# Altium PCB ReceiverPCB.PcbDoc
Units mm, origin at the board's own origin, x right, y up, seen from the top; angles counter-clockwise.
Board outline 74.42 x 28.07 mm, 2 copper layers (Top Layer, Bottom Layer); 47 components, 40 nets, 143 pads, 89 vias.
Unrouted connection lines stored in the file: 1.
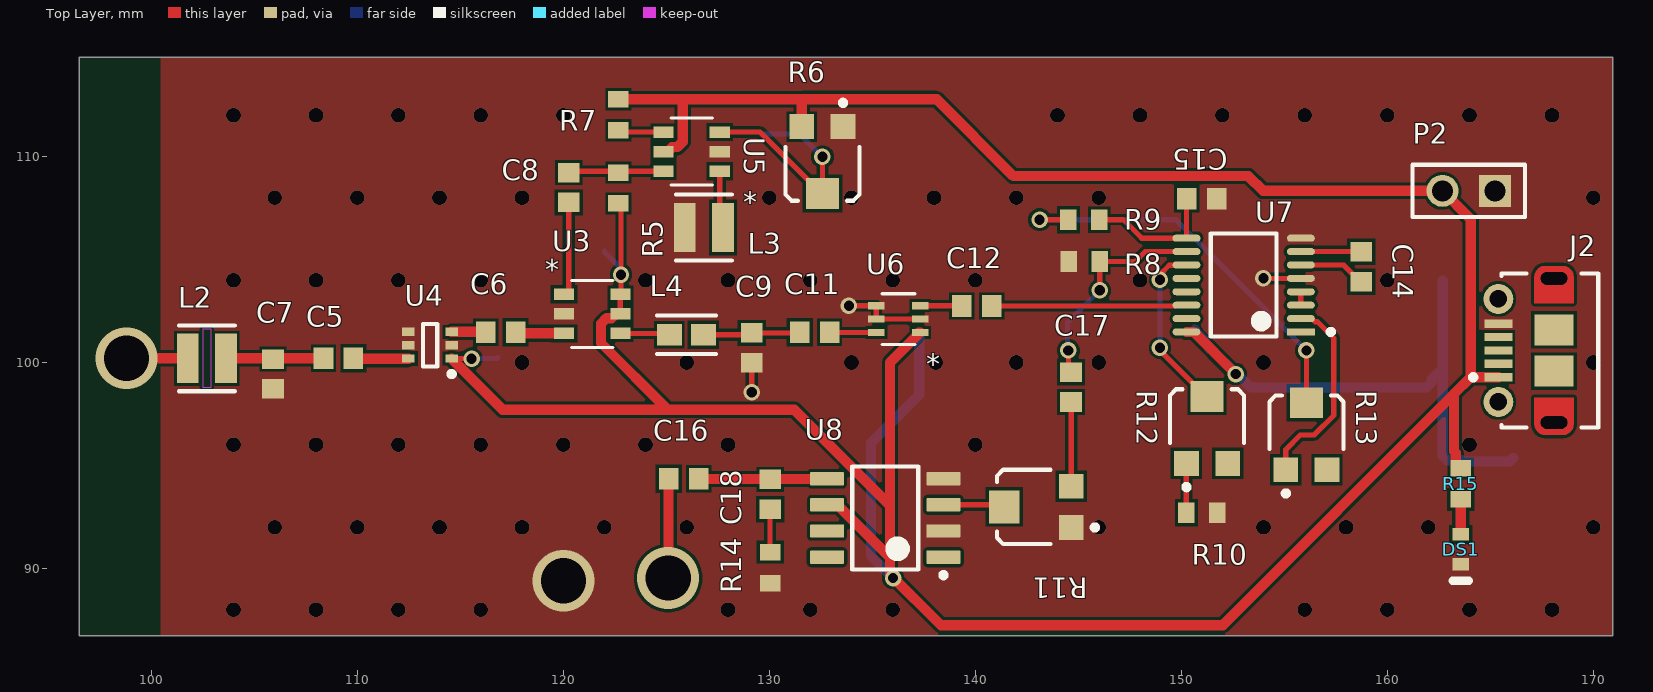
[diagram p0: Top Layer view]
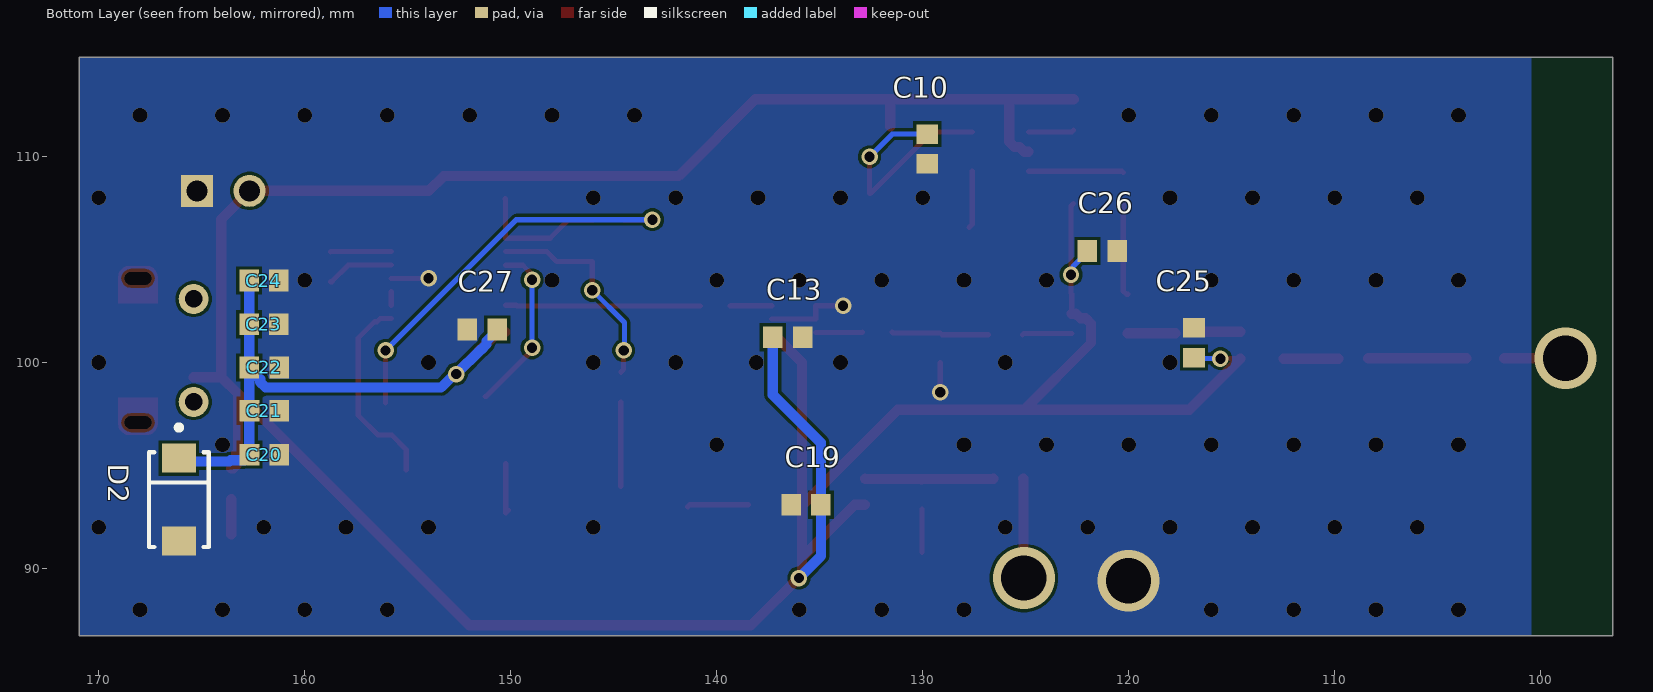
[diagram p1: Bottom Layer view, seen from below]
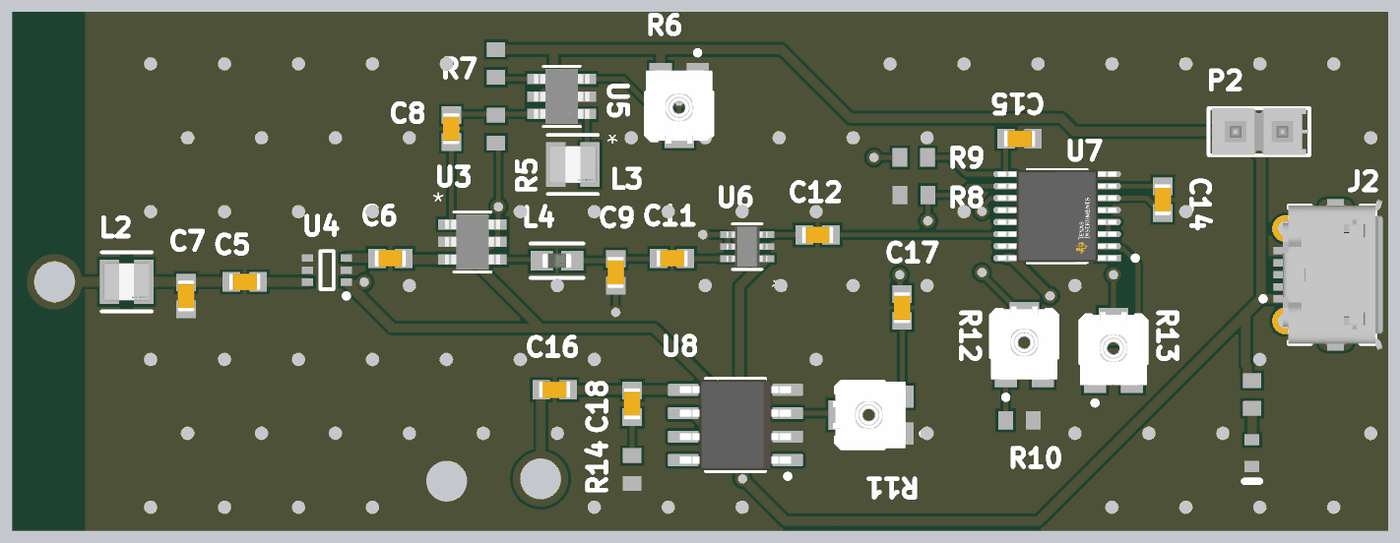
[diagram p2: 3D render of the assembled board from above, using the file's embedded part models]
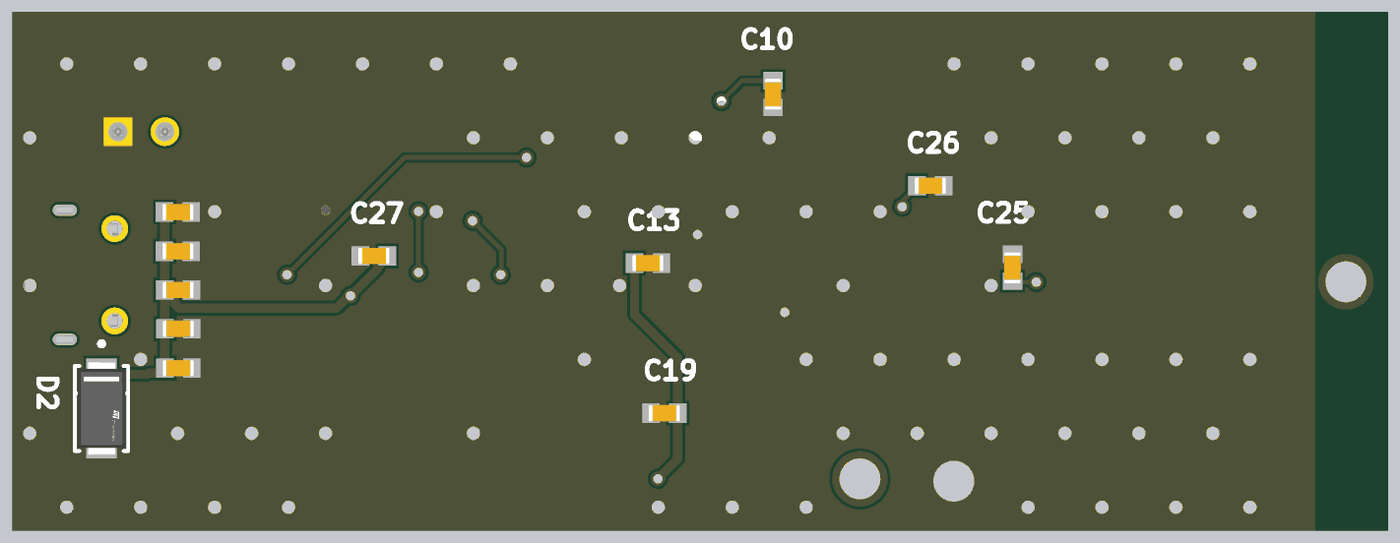
[diagram p3: 3D render of the assembled board from below, using the file's embedded part models]

## Layer stack, top to bottom
Top Solder: solder mask 0.0102, Solder Resist, Dk 3.5
Top Layer: signal copper 0.0356
Dielectric 1: dielectric 0.32, FR-4, Dk 4.8
Bottom Layer: signal copper 0.0356
Bottom Solder: solder mask 0.0102, Solder Resist, Dk 3.5

## Board outline
96.52,86.741 170.942,86.741 170.942,114.808 96.52,114.808

## Design rules (kind name [scope] priority, off if disabled: settings)
Clearance [All] p1: gap=0.15 ignorepadtopadclearanceinfootprint=FALSE
MinimumSolderMaskSliver [All] p1: minsoldermaskwidth=0.1
PolygonConnect [All] p1: connectstyle=Direct reliefconductorwidth=0.254 reliefentries=4 polygonreliefangle="90 Angle" airgapwidth=0.254
RoutingVias [All] p1: holewidth=8 width=10 viastyle="Through Hole" minholewidth=0.2 minwidth=0.4 maxholewidth=0.711 maxwidth=1.27
SolderMaskExpansion [All] p1: expansion=0 istentingtop=FALSE
SupplyNets "Schematic Supply Nets_1" [InNet('GND')] p1: voltage=0.000
SupplyNets "Schematic Supply Nets" [InNet('+5V')] p2: voltage=0.000
Width [All] p1: maxlimit=10 minlimit=0.1 preferedwidth=0.254 minimp=50.000000 maximp=50.000000 favimp=50.000000
29 further rules are at their usual default settings.

## Classes and differential pairs
component class Transmitter: C19 C20 C21
component class Receiver: C5 C6 C7 C8 C9 C10 C11 C12 C13 C14 C15 C16 C17 C18 C22 C23 C24 C25 C26 C27 D2 DS1 J2 L2 L3 L4 P2 R5 R6 R7 R8 R9 R10 R11 R12 R13 R14 R15 U3 U4 U5 U6 U7 U8

## Components (designator, comment, footprint, x,y, rotation, side; value= is the part's Value field where it differs from the comment)
C5 "100p" CAPC1608X90X35ML10T15 109.093,100.203 r0 top
C6 "100p" CAPC1608X90X35ML10T15 116.967,101.473 r0 top
C7 "111p" CAPC1608X90X35ML10T15 105.918,99.441 r90 top
C8 "100p" CAPC1608X90X35ML10T15 120.269,108.495 r270 top
C9 "125n" CAPC1608X90X35ML10T15 129.159,100.711 r90 top
C10 "100n" CAPC1608X90X35ML10T15 129.794,110.363 r90 bottom
C11 "1n" CAPC1608X90X35ML10T15 132.207,101.473 r180 top
C12 "1n" CAPC1608X90X35ML10T15 140.081,102.743 r180 top
C13 "22n" CAPC1608X90X35ML10T15 136.562,101.219 r0 bottom
C14 "1n" CAPC1608X90X35ML10T15 158.75,104.648 r270 top
C15 "100n" CAPC1608X90X35ML10T15 151.003,107.95 r180 top
C16 "250u" CAPC1608X90X35ML10T15 125.857,94.361 r180 top
C17 "100n" CAPC1608X90X35ML10T15 144.653,98.806 r270 top
C18 "50n" CAPC1608X90X35ML10T15 130.048,93.599 r90 top
C19 "1u" CAPC1608X90X35ML10T15 135.673,93.091 r180 bottom
C20 "1u" CAPC1608X90X35ML10T15 161.962,95.53 r0 bottom
C21 "1u" CAPC1608X90X35ML10T15 161.962,97.663 r0 bottom
C22 "100n" CAPC1608X90X35ML10T15 161.972,99.76 r0 bottom
C23 "100n" CAPC1608X90X35ML10T15 161.985,101.858 r0 bottom
C24 "100n" CAPC1608X90X35ML10T15 161.985,103.981 r0 bottom
C25 "100n" CAPC1608X90X35ML10T15 116.84,100.965 r270 bottom
C26 "100n" CAPC1608X90X35ML10T15 121.285,105.41 r0 bottom
C27 "100n" CAPC1608X90X35ML10T15 151.384,101.6 r180 bottom
D2 "SMAJ5.0A-TR" FP-SMA-MFG 166.116,93.345 r270 bottom
DS1 "TLMS1000-GS08" VISH-TLMS1000_V 163.576,90.932 r270 top
J2 "105017-0001" USB-MICRO-B_V 166.751,100.584 r90 top
L2 "1nH" FP-SRN2512-MFG 102.707,100.203 r0 top
L3 "11nH" FP-SRN2512-MFG 126.837,106.553 r0 top
L4 "1uH" FP-LQG18HH_00-IPC_A 125.984,101.346 r0 top
P2 "TSW-102-26-F-S" SMTC-TSW-102-26-XX-S 165.227,108.331 r180 top
R5 "1k" RESC1608X55X25ML10T15 122.682,108.47 r90 top
R6 "TC33X-2-103E" BOUR-TC33X-2_V 132.588,109.654 r270 top
R7 "1k" RESC1608X55X25ML10T15 122.682,112.026 r90 top
R8 "100k" RESC1608X55X25ML10T15 145.288,104.902 r180 top
R9 "1k" RESC1608X55X25ML10T15 145.276,106.934 r180 top
R10 "22k" RESC1608X55X25ML10T15 151.003,92.71 r0 top
R11 "TC33X-2-103E" BOUR-TC33X-2_V 142.863,92.992 r180 top
R12 "TC33X-2-103E" BOUR-TC33X-2_V 151.257,96.901 r90 top
R13 "TC33X-2-103E" BOUR-TC33X-2_V 156.083,96.594 r90 top
R14 "10" RESC1608X55X25ML10T15 130.048,90.043 r270 top
R15 "1k" RESC1608X55X25ML10T15 163.576,94.107 r270 top
U3 "MAX2680AUT+T" 21-0058I_MXM 121.412,102.362 r0 top
U4 "SMA3101-TL-E" ONSC-MCPH-6_V 113.538,100.838 r180 top
U5 "MAX2608EUT+T" 21-0058I_MXM 126.238,110.236 r180 top
U6 "BGA2815,115" SOT_2815,115_NXP 136.271,102.108 r180 top
U7 "CD74HC4046APWR" FP-PW0016A-IPC_C 153.035,103.759 r180 top
U8 "LM386M-1" D0008A_M 135.636,92.456 r180 top

## Footprints (in the part's own frame and the unit in brackets; to place one, negate y for a bottom-side part, rotate by r counter-clockwise, add the part's x,y. Pads: shape width x height; smd on the part's side, far side on the other; paste and mask are expansions set on the pad)
21-0058I_MXM [mil]
  rect 38.5x22 smd paste+0 mask+0: 1(-53.75,37.4) 2(-53.75,0) 3(-53.75,-37.4) 4(53.75,-37.4) 5(53.75,0) 6(53.75,37.4)
  silkscreen extent -40,-64 40,64, body extent -59,-59 59,59, height 57
BOUR-TC33X-2_V [mm] "SMD, 3-Leads, Body 3.8x3.6mm"
  rect 1.2x1.2 smd: 1(-1.8,1) 3(-1.8,-1)
  rect 1.5x1.6 smd: 2(1.45,0)
  silkscreen extent -3.07,-1.8 1.8,1.8, body extent -2,-1.8 1.96,1.8, height 1.15
CAPC1608X90X35ML10T15 [mm] "Chip Capacitor, 2-Leads, Body 1.7x0.9mm, IPC Low Density"
  rect 0.95x1.05 smd: 1(-0.725,0) 2(0.725,0)
  body extent -0.85,-0.45 0.85,0.45, height 0.9
D0008A_M [mm] "SOIC, 8-Leads, Body 5x4mm, Pitch 1.27mm, IPC Low Density"
  rrect15% 1.65x0.65 smd: 1(-2.825,1.905) 2(-2.825,0.635) 3(-2.825,-0.635) 4(-2.825,-1.905) 5(2.825,-1.905) 6(2.825,-0.635) 7(2.825,0.635) 8(2.825,1.905)
  silkscreen extent -2.95,-2.5 1.6,2.9, body extent -3,-2.45 3,2.45, height 1.63
FP-LQG18HH_00-IPC_A [mm]
  rect 1.206x1.058 smd paste+0 mask+0: 1(-0.826,0) 2(0.826,0)
  silkscreen extent -1.43,-0.93 1.43,0.93, body extent -1.93,-1.03 1.93,1.03, height 0.25
FP-PW0016A-IPC_C [mm]
  rect 1.355x0.341 smd paste+0 mask+0: 1(-2.775,2.275)
  rrect100% 1.355x0.341 smd paste+0 mask+0: 2(-2.775,1.625) 3(-2.775,0.975) 4(-2.775,0.325) 5(-2.775,-0.325) 6(-2.775,-0.975) 7(-2.775,-1.625) 8(-2.775,-2.275) 9(2.775,-2.275) 10(2.775,-1.625) 11(2.775,-0.975) 12(2.775,-0.325) 13(2.775,0.325) 14(2.775,0.975) 15(2.775,1.625) 16(2.775,2.275)
  silkscreen extent -4.35,-2.5 1.6,2.5, body extent -3.55,-2.6 3.55,2.6, height 0.25
FP-SMA-MFG [mm]
  rect 1.4x1.64 smd paste+0 mask+0: 1(-2.015,0) 2(2.015,0)
  silkscreen extent -3.62,-1.45 2.3,1.45, body extent -2.54,-1.29 2.54,1.29, height 2.65
FP-SRN2512-MFG [mm]
  rect 1.05x2.4 smd paste+0 mask+0: 1(-0.925,0) 2(0.925,0)
  silkscreen extent -1.35,-1.6 1.35,1.6, body extent -1.55,-1.3 1.55,1.3, height 0.25
ONSC-MCPH-6_V [mm] "SOT23, 6-Leads, Body 2x1.6mm, Pitch 0.65mm"
  rect 0.6x0.4 smd: 1(-1.05,0.65) 2(-1.05,0) 3(-1.05,-0.65) 4(1.05,-0.65) 5(1.05,0) 6(1.05,0.65)
  silkscreen extent -1.18,-1.03 0.35,1.52, body extent -0.8,-1 0.8,1, height 0.9
RESC1608X55X25ML10T15 [mm] "Chip Resistor, 2-Leads, Body 1.60x0.80mm, IPC Low Density"
  rect 0.8x1 smd: 1(-0.75,0) 2(0.75,0)
  body extent -0.85,-0.45 0.85,0.45, height 0.55
SMTC-TSW-102-26-XX-S [mm] ".025 SQ Post Terminal Strip Assembly, 1x2 Pins, Vertical, 2.54mm Pitch, Male"
  rect 1.55x1.55 hole 1.02: 1(0,0)
  round 1.55 hole 1.02: 2(2.54,0)
  silkscreen extent -1.46,-1.27 4,1.27, body extent -1.4,-1.27 3.81,1.27, height 8.38
SOT_2815,115_NXP [mil]
  rect 31x14 smd paste+0 mask+0: 1(-42,25.59) 2(-42,0) 3(-42,-25.59) 4(42,-25.59) 5(42,0) 6(42,25.59)
  silkscreen extent -32,-49 32,49, body extent -44,-44 44,44, height 43
USB-MICRO-B_V [mm] "USB, MICRO B, Body 7.491x4.695 mm, Pitch 0.65 mm"
  rect 0.4x1.35 smd: 1(-1.3,1.35) 2(-0.65,1.35) 3(0,1.35) 4(0.65,1.35) 5(1.3,1.35)
  round 1.45 hole 0.85: 6(-2.5,1.35) 7(2.5,1.35)
  rrect50% 0x0 hole 0.6 slot 1.3 at 90 deg: 8(-3.5,-1.35) 11(3.5,-1.35)
  rect 1.5x1.9 smd: 9(-1,-1.35) 10(1,-1.35)
  Top Layer circle w0.5: c-3.6,-1.8 r0.25
  Top Layer circle w0.5: c-3.6,-0.9 r0.25
  Top Layer circle w0.5: c3.6,-1.8 r0.25
  Top Layer circle w0.5: c3.6,-0.9 r0.25
  Top Layer region: -3.6,-1.8 -3.6,-0.9 -4.1,-0.9 -4.1,-1.8
  Top Layer region: 3.6,-0.9 3.6,-1.8 4.1,-1.8 4.1,-0.9
  Top Layer region: 2.3,-0.4 2.3,-2.3 3.6,-2.3 3.6,-0.4
  Top Layer region: -2.3,-2.3 -2.3,-0.4 -3.6,-0.4 -3.6,-2.3
  silkscreen extent -3.75,-3.5 3.75,2.7, body extent -4.1,-3.9 4.1,1.5, height 2.67
VISH-TLMS1000_V [mm] "SMD, 2-Leads, Body 0.8x1.6mm"
  rect 0.6x0.8 smd: 1(-0.725,0) 2(0.725,0)
  silkscreen extent 1.52,-0.4 1.52,0.4, body extent -0.8,-0.4 0.8,0.4, height 0.65

## Part data
C5 C6 C7 C8 C9 C10 C11 C12 C13 C14 C15 C16 C17 C18 C19 C20 C21 C22 C23 C24 C25 C26 C27: library part CMP-2100-03643-1, "Chip Capacitor, 0.1 uF, +/- 10%, 50 V, -55 to 125 degC, 0603 (1608 Metric), RoHS, Tape and Reel", Capacitance=100nF, Case Code (Imperial)=0603, Case Code (Metric)=1608, Dielectric=X7R, Dielectric Material=Ceramic, Insulation Resistance=10GR, Manufacturer=Murata, Max Operating Temperature=125degC, Min Operating Temperature=-55degC, Package Description="2-Pin Surface Mount Device, Body 1.6 x 0.8 mm", Package Quantity=1, Tolerance=10%, Voltage=50V, Case/Package=0603, Contact Plating=Tin, Datasheet URL=http://psearch.en.murata.com/capacitor/product/GRM188R71H104KA93%23.pdf, Datasheet Version=42675.0, Depth=0.8mm, Height=0.8mm, Lead Free=LeadFree, Length=1.6mm, Manufacturer URL=http://www.murata.com/, Material=Ceramic, Mount=SurfaceMount, Number of Pins=2, Package Reference=0603, Packaging=TapeandReel, Radiation Hardening=No, REACH SVHC=NoSVHC, RoHSCompliant=true, Termination=SMD/SMT, Thickness=0.035inch, Voltage Rating=50V, Voltage Rating (DC)=50V, Width=0.8mm
D2: library part CMP-12225-000048-1, "TVS DIODE 5V 13.4V SMA", Breakdown Voltage=6.4V, Clamping Voltage=9.2V, Manufacturer=STMicroelectronics, Max Junction Temp=+150°C, Package=SMA, Peak Pulse Current=43.5A, Peak Pulse Power=400W, Reverse Standoff Voltage=5V, Temperature="-55°C to +150°C", Temperature Range Low=-55°C, Automotive=No, Category=Diode, ComponentLink2Description=Datasheet, ComponentLink2URL=https://www.st.com/resource/en/datasheet/smaj.pdf, Device Class L1="Circuit Protection", Device Class L2="TVS Diodes", Device Class L3=unset, Digikey Description="TVS DIODE 5V 13.4V SMA", Direction=Unidirectional, Height=2.65mm, Lead Free=Yes, Manufacturer Part Number=SMAJ5.0A-TR, Mouser Description="Transient Voltage Suppressor, TVS, Transil SMAJ Series, Unidirectional, 5 V, DO-214AC, 2, 6.4 V", Number Of Channels=1, Octopart=https://octopart.com/smaj5.0a-tr-stmicroelectronics-347063, RoHS=TRUE, Standoff Height=0.05mm, Temperature Range High=+150°C
DS1: library part CMP-2000-07254-1, "Low Current LED, 40 mW, 1.8 V, -40 to 100 degC, 2-Pin SMD (0603), RoHS, Tape and Reel", Forward Current If=2mA, Forward Voltage=1.8V, LED Colour=Red, Manufacturer=Vishay, Package Description="2-Pin Surface Mount Device, Body 1.6 x 0.8 mm", Package Reference=TLMS1000, Automotive Qualification Standard=AEC-Q100, Bulb Size=1.6mmx0.8mm, Datasheet URL=https://datasheet.ciiva.com/5798/1698881-5798337.pdf, Datasheet Version="Rev. 1.7, 02/2011", LED Mounting=SMD, Lens Shape=Rectangular, Luminous Intensity=4mcd, Manufacturer URL=http://www.vishay.com/, Mounting Technology=SurfaceMount, MSL=MSL2-1year, Packaging=CutTape, Product Range=-, SVHC=ToBeAdvised, Viewing Angle=80°, Wavelength Typ=636nm
J2: library part CMP-2000-05827-1, "Micro-USB B Receptacle, Right Angle, Bottom Mount, Surface Mount, with Solder Tabs, -30 to 85 degC, 5-Pin USB, RoHS, Tape and Reel", Manufacturer=Molex, Package Description="5-Leads USB, Micro B, Body 7.5 x 5 mm, Pitch 0.65 mm", Package Reference=MICRO-B, Package Version="Rev. F, 12/2012", Standard Package=1, Voltage - Max=30V, 3D Model=105017-0001.stp, Catalog Drawings=1050170001, Category=Connectors,Interconnects, Circuits=5, Connector Type=USB-microB, Datasheet URL=http://www.molex.com/elqNow/elqRedir.htm?ref=http://www.molex.com/webdocs/datasheets/pdf/en-us/1050170001_IO_CONNECTORS.pdf, Datasheet Version=03/2016, Family=USB,DVI,HDMIConnectors, Featured Product=Micro-USBConnectorsUSBConnectors, Features=Shielded,SolderRetention, Gender=Receptacle, Ingress Protection=-, Manufacturer URL=http://www.molex.com/, Mating Products=WM17145-ND-CABLEMICROUSBBTOSTDA1.0MWM17147-ND-CABLEMICROUSBBTOSTDA2.0MWM17146-ND-CABLEMICROUSBBTOSTDA1.5M, Mounting Technology=SurfaceMount, Mounting Type=BoardCutout,SurfaceMount,RightAngle, Number of Contacts=5, Online Catalog=Molex-MicroUSB, Other Names=WM1399DKR, Package URL=http://www.molex.com/pdm_docs/sd/1050170001_sd.pdf, Packaging=Digi-Reel®, PCN Assembly/Origin=ResinSupplier21/Oct/2015, RoHS Information=1050170001CertofCompliance, Series=-, Specifications=-
L2 L3: library part CMP-07248-000049-1, "FIXED IND 240NH 4.7A 24 MOHM SMD", Case Code (Imperial)=1008, Case Code (Metric)=2520, Current Rating=4.7A, DC Resistance (DCR)=24mR, Inductance=240nH, Inductance Tolerance=20%, Max Operating Temperature=125°C, Min Operating Temperature=-55°C, Package Quantity=2000, Resistor Type=Wirewound, Saturation Current=8A, Self Resonant Frequency=330MHz, Test Frequency=1MHz, Case/Package=1008, Core Material=Ferrite, Depth=2mm, Height=1.2mm, Height - Seated (Max)=0.047inch, Length=2.5mm, Max DC Current=4.7A, Mount="Surface Mount", Packaging="Tape and Reel", REACH SVHC="No SVHC", RMS Current (Irms)=4.7A, RoHS Compliant=Yes, Shielding=Shielded, Termination=SMD/SMT, Tolerance=20%, Weight=0.001058oz, Width=0.079inch
L4: library part CMP-06042-006288-1, "Multilayer type RF Inductor 2.2nH ±0.3nH 0.1Ω 1100mA 0603", Case Code (Imperial)=0603, Case Code (Metric)=1608, Current Rating=500mA, DC Resistance (DCR)=100mR, Inductance=2.2nH, Max Operating Temperature=85°C, Min Operating Temperature=-40°C, Package Quantity=4000, Self Resonant Frequency=6GHz, Test Frequency=100MHz, Case/Package=0603, Core Material=Air, DC Current=500mA, Depth=0.95mm, Height=0.8mm, Height - Seated (Max)=0.037inch, Lead Free="Lead Free", Length=0.063inch, Max DC Current=500mA, Military Standard=Not, Mount="Surface Mount", Number of Pins=2, Packaging="Tape and Reel", Q Factor=12, Radiation Hardening=No, REACH SVHC="No SVHC", Shielding=Unshielded, Termination=SMD/SMT, Width=0.031inch
P2: library part CMP-1024-00329-1, "0.025\" SQ Post Header, Through-hole, Vertical, -55 to 125 degC, 2.54 mm Pitch, 2-Pin, Male, RoHS", Manufacturer=Samtec, Temperature Range="-55 to 125 degC", ComponentLink1Description="Manufacturer URL", ComponentLink1URL=http://www.samtec.com, ComponentLink2Description=Datasheet, ComponentLink2URL=http://www.samtec.com/documents/webfiles/pdf/TSW_TH.PDF, ComponentLink3Description="Package Specification", ComponentLink3URL=http://www.samtec.com/documents/webfiles/cpdf/TSW-XXX-XX-XXX-X-XX-XXX-MKT.pdf, DatasheetVersion=F-214, Mounting Technology=Through-hole, Orientation=Vertical, PackageDescription=".025[0.64] SQ. Post Terminal Strip Assembly", PackageReference=TSW-102-26-XX-S, PackageVersion="DM, 8/1988", PartNumber=TSW-102-26-F-S, Pitch="2.54 mm", RoHS=True
R5 R7 R8 R9 R10 R14 R15: library part CMP-2100-03667-1, "Chip Resistor, 0 Ohm, +/- 5%, 0.1 W, -55 to 155 degC, 0603 (1608 Metric), RoHS, Tape and Reel", Case Code (Imperial)=0603, Case Code (Metric)=1608, Manufacturer=Yageo, Max Operating Temperature=155degC, Min Operating Temperature=-55degC, Package Description="2-Pin Surface Mount Device, Body 1.6 x 0.8 mm", Package Quantity=5000, Power Rating=100mW, Resistance=0mOhm, Temperature Coefficient=200ppm/degreesC, Tolerance=5%, Voltage Rating=50V, Case/Package=0603, Composition=ThickFilm, Contact Plating=Tin, Datasheet URL=http://www.yageo.com/NewPortal/yageodocoutput?fileName=/pdf/R-Chip/PYu-RC_Group_51_RoHS_L_5.pdf, Datasheet Version="Rev. 5, 10/2016", Depth=0.8mm, Height=0.45mm, Lead Free=LeadFree, Length=1.6mm, Manufacturer URL=http://www.yageo.com/, Military Standard=Not, Number of Pins=2, Package Reference=0603, Packaging=TapeandReel, Radiation Hardening=No, REACH SVHC=NoSVHC, RoHSCompliant=true, Termination=SMD/SMT, Voltage Rating (DC)=50V, Width=0.8mm
R6 R11 R12 R13: library part CMP-2100-03695-1, "Trimming Potentiometer, 10000 Ohm, -40 to 100 degC, 3-Pin SMD, RoHS, Tape and Reel", Case/Package=SMD/SMT, Colour=Silver, Manufacturer=Bourns, Max Operating Temperature=100degC, Max Power Dissipation=100mW, Min Operating Temperature=-40degC, Package Description="3-Pin Surface Mount Device, Body 3.8 x 3.6 mm", Package Quantity=2500, Package Reference=TC33X-2, Resistance=10KOhm, Temperature Coefficient=250ppm/degreesC, Tolerance=25%, Voltage Rating (DC)=50V, Composition=Potentiometer, Contact Plating=Silver, Datasheet URL=http://www.bourns.com/docs/Product-Datasheets/TC33.pdf, Datasheet Version=42583.0, Depth=3.8mm, Height=0.047inch, Lead Free=LeadFree, Length=3mm, Manufacturer URL=http://www.bourns.com/, Military Standard=Not, Mount=SurfaceMount, Number of Turns=1, Packaging=TapeandReel, Power Rating=100mW, Radiation Hardening=No, REACH SVHC=NoSVHC, RoHSCompliant=true, Taper=Linear, Termination=FootPrint, Weight=29.4mg, Width=0.118inch
U3 U5: "No Description Available", Mfr_Name="Analog Devices / Maxim Integrated", RefDes=RefDes, Type=Type
U4: library part CMP-1314-00002-1, "MMIC, Amplifier, 5 V, 10 mA, 0.1 to 3 GHz, 4.5 to 5.5 V, -40 to 85 degC, 6-Pin MCPH, Pb-Free, Tape and Reel", Manufacturer="On Semiconductor", Power Gain Max (dB)=28.5, Power Gain Min (dB)=21.5, Upper Freq (3 dB) (GHz)=3, ComponentLink1Description="Manufacturer URL", ComponentLink1URL=http://www.onsemi.com/, ComponentLink2Description=Datasheet, ComponentLink2URL=http://www.onsemi.com/pub_link/Collateral/ENA1431A-D.PDF, ComponentLink3Description="Package Specification", ComponentLink3URL=http://www.onsemi.com/pub_link/Collateral/ENA1601-D.PDF, DatasheetVersion="Rev. 1", ICC Max (mA)=12.6, ICC Min (mA)=7.1, Mounting Technology="Surface Mount", Noise Figure Max (dB)=5.3, PackageDescription="6-Pin Small Outline Transistor, Body 2 x 1.6 mm, Pitch 0.65 mm", PackageReference=MCPH-6, Packing="Tape and Reel", PartNumber=SMA3101-TL-E, RoHS=TRUE, VCC Max (V)=5.5, VCC Min (V)=4.5
U6: "No Description Available", Mfr_Name=NXP, RefDes=RefDes, Type=Type
U7: library part CMP-0776-00067-4, "IC PLL W/VCO 16-TSSOP", Case/Package=TSSOP, Frequency=18MHz, Max Frequency=38MHz, Max Operating Temperature=125°C, Max Supply Voltage=6V, Min Operating Temperature=-55°C, Min Supply Voltage=2V, Nominal Supply Current=8uA, Package Quantity=2000, Contact Plating=Gold, Height=1.15mm, Input=CMOS, Lead Free="Lead Free", Length=5mm, Mount="Surface Mount", Number of Bits=1, Number of Circuits=1, Number of Elements=1, Number of Pins=16, Packaging="Tape and Reel", PLL=Yes, Radiation Hardening=No, REACH SVHC="No SVHC", RoHS Compliant=Yes, Series=74HC, Supply Current=8uA, Weight=0.002183oz, Width=4.4mm
U8: library part CMP-0057-00421-4, "Low Voltage Audio Power Amplifier, 8-pin Narrow SOIC", Manufacturer="Texas Instruments", PackageTopMarking=NSZXTT*LM386*M-1, PowerWise=N, Code_IPC=SOIC127P600-8, Code_JEDEC=MS-012-AA, ComponentLink1Description="Datasheet URL", ComponentLink1URL=http://www.ti.com/general/docs/lit/getliterature.tsp?genericPartNumber=LM386&fileType=pdf, CompType="Audio IC", PackageDescription="SOIC Narrow, 4.9 x 3.9 x 1.45mm, 8 Lead, 1.27mm Pitch", PackageReference=D0008A, PinCount=8, RoHS=N

## Via types
v1: diameter 0.711, hole 0.711, Top Layer to Bottom Layer, 72 vias
v2: diameter 0.8, hole 0.5, Top Layer to Bottom Layer, 14 vias
v3: diameter 3, hole 2.2, Top Layer to Bottom Layer, 3 vias

## Nets (pads, with @x,y where several pads share a name; then routed paths per layer and width w, separated by ;. In a path a pad name is that pad's centre, name@x,y a point inside that pad or via, vN(x,y) a via of type N, cw(c..) or ccw(c..) an arc to the next point about the centre after c; other vN are vias at no path point)
+5V: C13.2 C19.2 C20.2 C21.2 C22.2 C23.2 C24.2 C25.2 C26.2 C27.2 D2.1 J2.1 P2.2 R5.1 R6.3 R7.2 R15.1 U3.5 U3.6 U4.1 U5.5 U6.1 U7.16 U8.6 | length 193.7
  Top Layer w0.254: U4.1 v2(115.555,100.188) ; R5.1 122.809,107.593 v2(122.809,104.267) 122.809,103.344 U3.6 U3.5
  Top Layer w0.5: U4.1 117.074,97.702 125.083,97.702 ; R7.2 125.857,112.776 ; U3.5 122.568,102.362 122.347,102.141 122.102,102.141 121.838,101.878 121.838,100.946 125.083,97.702 ; U5.5 125.082,110.236 125.303,110.457 125.548,110.457 125.812,110.72 125.812,112.731 125.857,112.776 ; R6.3 131.588,112.76 131.572,112.776 ; U8.6 133.311,93.091 135.864,90.538 ; U6.1 137.266,101.458 137.194,101.386 137.194,101.314 135.864,99.984 135.864,93.066 ; U7.16 150.608,101.484 v2(152.651,99.441) ; R15.1 163.476,94.857 163.326,95.007 163.326,95.605 163.244,95.687 163.244,98.474 ; J2.1 164.054,99.284 ; 125.083,97.702 131.228,97.702 135.864,93.066 ; 125.857,112.776 131.572,112.776 ; 131.572,112.776 138.135,112.776 141.859,109.052 153.262,109.052 153.983,108.331 P2.2 164.054,106.964 164.054,99.284 ; 135.864,90.538 135.864,93.066 ; 135.864,90.538 135.864,89.727 138.342,87.249 152.019,87.249 163.244,98.474 ; 163.244,98.474 164.054,99.284
  Bottom Layer w0.254: v2(115.555,100.188) 116.788,100.188 C25.2 ; C26.2 122.01,105.36 122.705,104.665
  Bottom Layer w0.5: v2(136.017,89.535) 134.948,90.604 C19.2 134.948,96.098 137.287,98.437 C13.2 ; C27.2 150.659,101.55 151.184,101.025 151.184,100.889 151.448,100.625 151.47,100.625 152.651,99.444 v2(152.651,99.441) 152.732,99.441 153.388,98.785 161.908,98.785 162.172,99.049 162.172,99.185 C22.2@162.697,99.71 ; C22.2 162.703,99.767 162.703,101.853 162.698,101.858 162.698,103.969 C24.2 ; C22.2 162.698,95.542 C20.2 162.687,95.48 162.912,95.255 163.605,95.255 163.666,95.194 165.95,95.194 D2.1
ANT: 
ANT_REC: L2.1 | length 3
  Top Layer w0.508: v3(98.806,100.203) L2.1
GND: C7.1 C9.1 C10.1 C13.1 C15.1 C19.1 C20.1 C21.1 C22.1 C23.1 C24.1 C25.1 C26.1 C27.1 D2.2 DS1.2 J2.5 L3.1 P2.1 R6.1 R8.2 R10.2 R11.1 R14.2 U3.2 U4.2 U4.4 U4.5 U5.2 U6.2 U6.4 U6.5 U7.5 U7.8 U8.2 U8.4 | length 7.4
  Top Layer w0.254: v2(129.159,98.552) C9.1 ; v2(133.873,102.758) U6.4 U6.5 U6.2 ; v2(153.995,104.084) U7.5
  other v1: 104,88 108,88 112,88 116,88 128,88 132,88 136,88 156,88 160,88 164,88 168,88 106,92 110,92 114,92 118,92 122,92 126,92 146,92 154,92 158,92 162,92 170,92 104,96 108,96 112,96 116,96 120,96 124,96 128,96 140,96 164,96 118,100 126,100 134,100 138.093,100 142,100 146,100 154,100 170,100 104,104 108,104 112,104 116,104 124,104 128,104 132,104 136,104 140,104 148,104 160,104 106,108 110,108 114,108 118,108 130,108 134,108 138,108 142,108 146,108 170,108 104,112 108,112 112,112 116,112 120,112 144,112 148,112 152,112 156,112 160,112 164,112 168,112
  other v3: 120.015,89.408
IF: C9.2 C11.2 L4.2 | length 4.7
  Top Layer w0.254: L4.2 129.069,101.346 C9.2 131.445,101.436 C11.2
IF_AMP: C12.1 U7.14 | length 9.5
  Top Layer w0.254: C12.1 149.688,102.743 149.729,102.784 U7.14
LO: C8.2 U3.1 | length 4.6
  Top Layer w0.254: U3.1 120.117,103.312 120.269,103.464 C8.2
NetC1_1: 
NetC1_2: 
NetC2_1: 
NetC2_2: 
NetC3_1: 
NetC5_1: C5.1 C7.2 L2.2 | length 4.7
  Top Layer w0.508: L2.2 C5.1
NetC5_2: C5.2 U4.6 | length 2.7
  Top Layer w0.254: C5.2 C5.2@109.833,100.188
  Top Layer w0.508: C5.2@109.833,100.188 U4.6
NetC6_1: C6.1 U4.3 | length 1.7
  Top Layer w0.254: C6.1@116.227,101.488 C6.1
  Top Layer w0.508: U4.3 C6.1@116.227,101.488
NetC6_2: C6.2 U3.3 | length 2.4
  Top Layer w0.254: C6.2 C6.2@117.753,101.412
  Top Layer w0.508: C6.2@117.753,101.412 U3.3
NetC8_1: C8.1 R5.2 U5.6 | length 4.6
  Top Layer w0.254: C8.1 120.335,109.286 U5.6
NetC10_2: C10.2 R6.2 U5.3 | length 11.3
  Top Layer w0.254: U5.3 129.556,111.186 132.538,108.204 R6.2 v2(132.588,109.982)
  Bottom Layer w0.254: C10.2 131.482,111.088 v2(132.588,109.982)
NetC11_1: C11.1 U6.6 | length 2.3
  Top Layer w0.254: C11.1 132.947,101.458 U6.6
NetC12_2: C12.2 U6.3 | length 2
  Top Layer w0.254: U6.3 139.341,102.758 C12.2
NetC14_1: C14.1 U7.7 | length 2.9
  Top Layer w0.254: U7.7 158.739,105.384 C14.1
NetC14_2: C14.2 U7.6 | length 3.3
  Top Layer w0.254: U7.6 157.889,104.734 158.7,103.923 C14.2
NetC15_2: C15.2 R9.1 U7.9 | length 6.5
  Top Layer w0.254: R9.1 147.193,106.934 148.093,106.034 U7.9 150.26,107.932 C15.2
NetC16_1: C16.1 C18.2 U8.5 | length 6.3
  Top Layer w0.5: C16.1 126.601,94.343 130.03,94.343 C18.2 130.066,94.343 132.793,94.343 U8.5
NetC17_1: C17.1 R8.1 U7.10 | length 10.4
  Top Layer w0.254: v2(144.526,100.584) 144.526,99.658 C17.1 ; v2(146.05,103.505) 146.05,104.89 R8.1 147.779,104.902 148.261,105.384 U7.10
  Bottom Layer w0.254: v2@144.489,100.674 144.489,101.944 v2(146.05,103.505)
NetC17_2: C17.2 R11.3 | length 4.1
  Top Layer w0.254: C17.2 144.663,98.071 R11.3
NetC18_1: C18.1 R14.1 | length 2.1
  Top Layer w0.254: R14.1 C18.1
NetDS1_1: DS1.1 R15.2 | length 1.7
  Top Layer w0.5: DS1.1 R15.2
NetL1_2: 
NetL3_2: L3.2 U5.1 | length 2.8
  Top Layer w0.254: U5.1 127.603,106.712 L3.2
NetL4_1: L4.1 U3.4 | length 2.4
  Top Layer w0.254: U3.4 125.092,101.412 L4.1
NetR4_1: 
NetR7_1: R7.1 U5.4 | length 2.2
  Top Layer w0.254: R7.1 122.772,111.186 U5.4
NetR9_2: R9.2 R13.2 | length 19.5
  Top Layer w0.254: v2(143.129,106.934) R9.2 ; R13.2 v2(156.083,100.584)
  Bottom Layer w0.254: v2(143.129,106.934) 149.733,106.934 v2(156.083,100.584)
NetR10_1: R10.1 R12.1 | length 2.6
  Top Layer w0.254: R10.1@150.121,92.842 R10.1 150.253,95.097 R12.1
NetR11_2: R11.2 U8.3 | length 3
  Top Layer w0.254: U8.3 141.314,93.091 R11.2
NetR12_2: R12.2 U7.11 | length 8.4
  Top Layer w0.254: v2(148.971,100.711) 148.971,100.587 151.207,98.351 R12.2 ; v2(148.971,104.013) 148.971,104.267 149.421,104.717 150.243,104.717 U7.11
  Bottom Layer w0.254: v2(148.971,100.711) v2(148.971,104.013)
NetU7_3: U7.3 U7.4 | length 0.7
  Top Layer w0.254: U7.3 U7.4
PC1: R13.1 U7.2 | length 9.7
  Top Layer w0.254: R13.1 155.083,95.775 155.785,96.477 156.458,96.477 157.41,97.429 157.41,101.195 156.624,101.981 156.494,101.981 156.341,102.134 U7.2
SPK_OUT: C16.2 | length 4.8
  Top Layer w0.5: v3(125.095,89.535) 125.113,89.553 125.113,94.343 C16.2
pads on no net: J2.2 J2.3 J2.4 J2.6 J2.7 J2.8 J2.9 J2.10 J2.11 R12.3 R13.3 U7.1 U7.12 U7.13 U7.15 U8.1 U8.7 U8.8

## Polygon pours and split planes (outlines as drawn)
GND on Top Layer "GND_L01_P001" (solid, pour order 1): 100.584,114.808 100.593,114.808 170.942,114.808 170.942,86.741 100.457,86.741 100.457,114.808
GND on Bottom Layer "GND_L02_P000" (solid, pour order 0): 100.457,114.808 170.942,114.808 170.942,86.741 100.457,86.741

## Keep-outs
Top Layer:
  rectangle: 102.507,98.803 102.907,101.603

## Text inside footprints (layer, text, board x,y; h text height)
J2: Mechanical 1 "PCB EDGE" at 169.651,93.384 h1 r90
U3: Top Overlay "*" at 119.126,104.013 h1; Mechanical 13 "*" at 120.599,102.514 h1
U5: Top Overlay "*" at 129.413,108.712 h1 r180; Mechanical 13 "*" at 127.051,110.084 h1 r180
U6: Top Overlay "*" at 138.303,100.838 h1 r180; Mechanical 13 "*" at 136.881,102.349 h1 r180